# Allegro board QUADCOPTER1mthrbrd1_1.brd
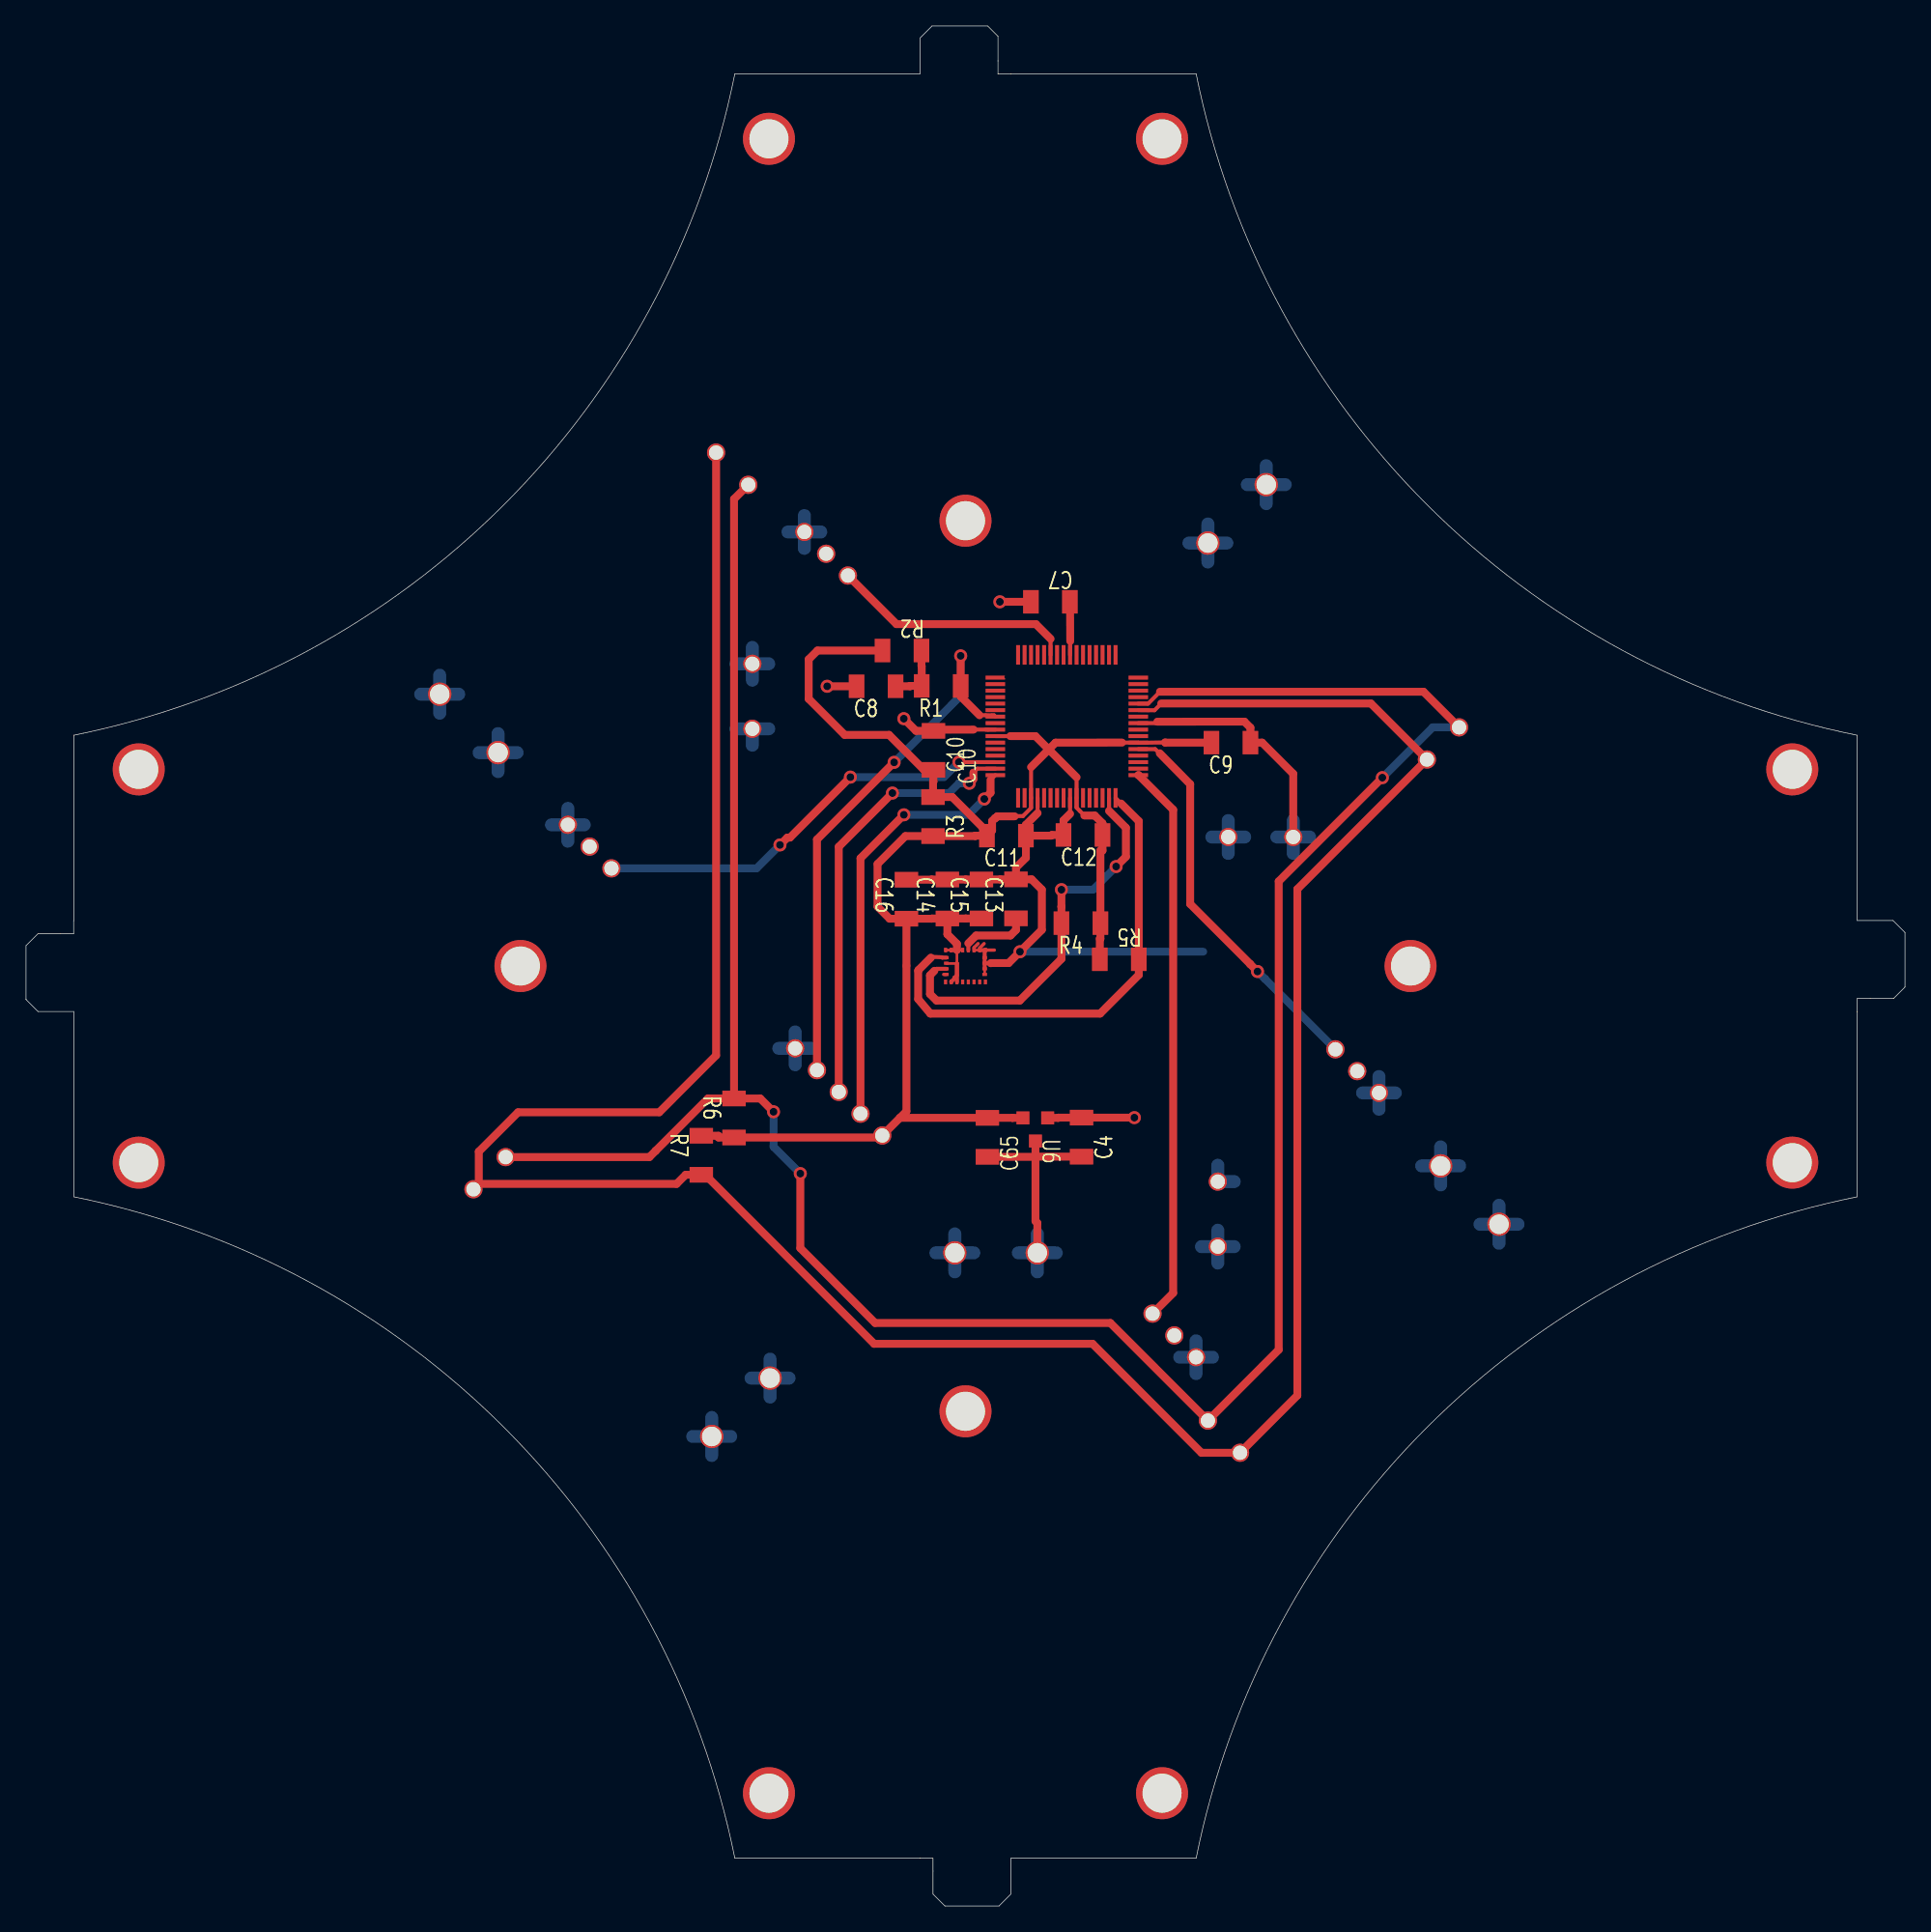
[diagram p0: board, top side]
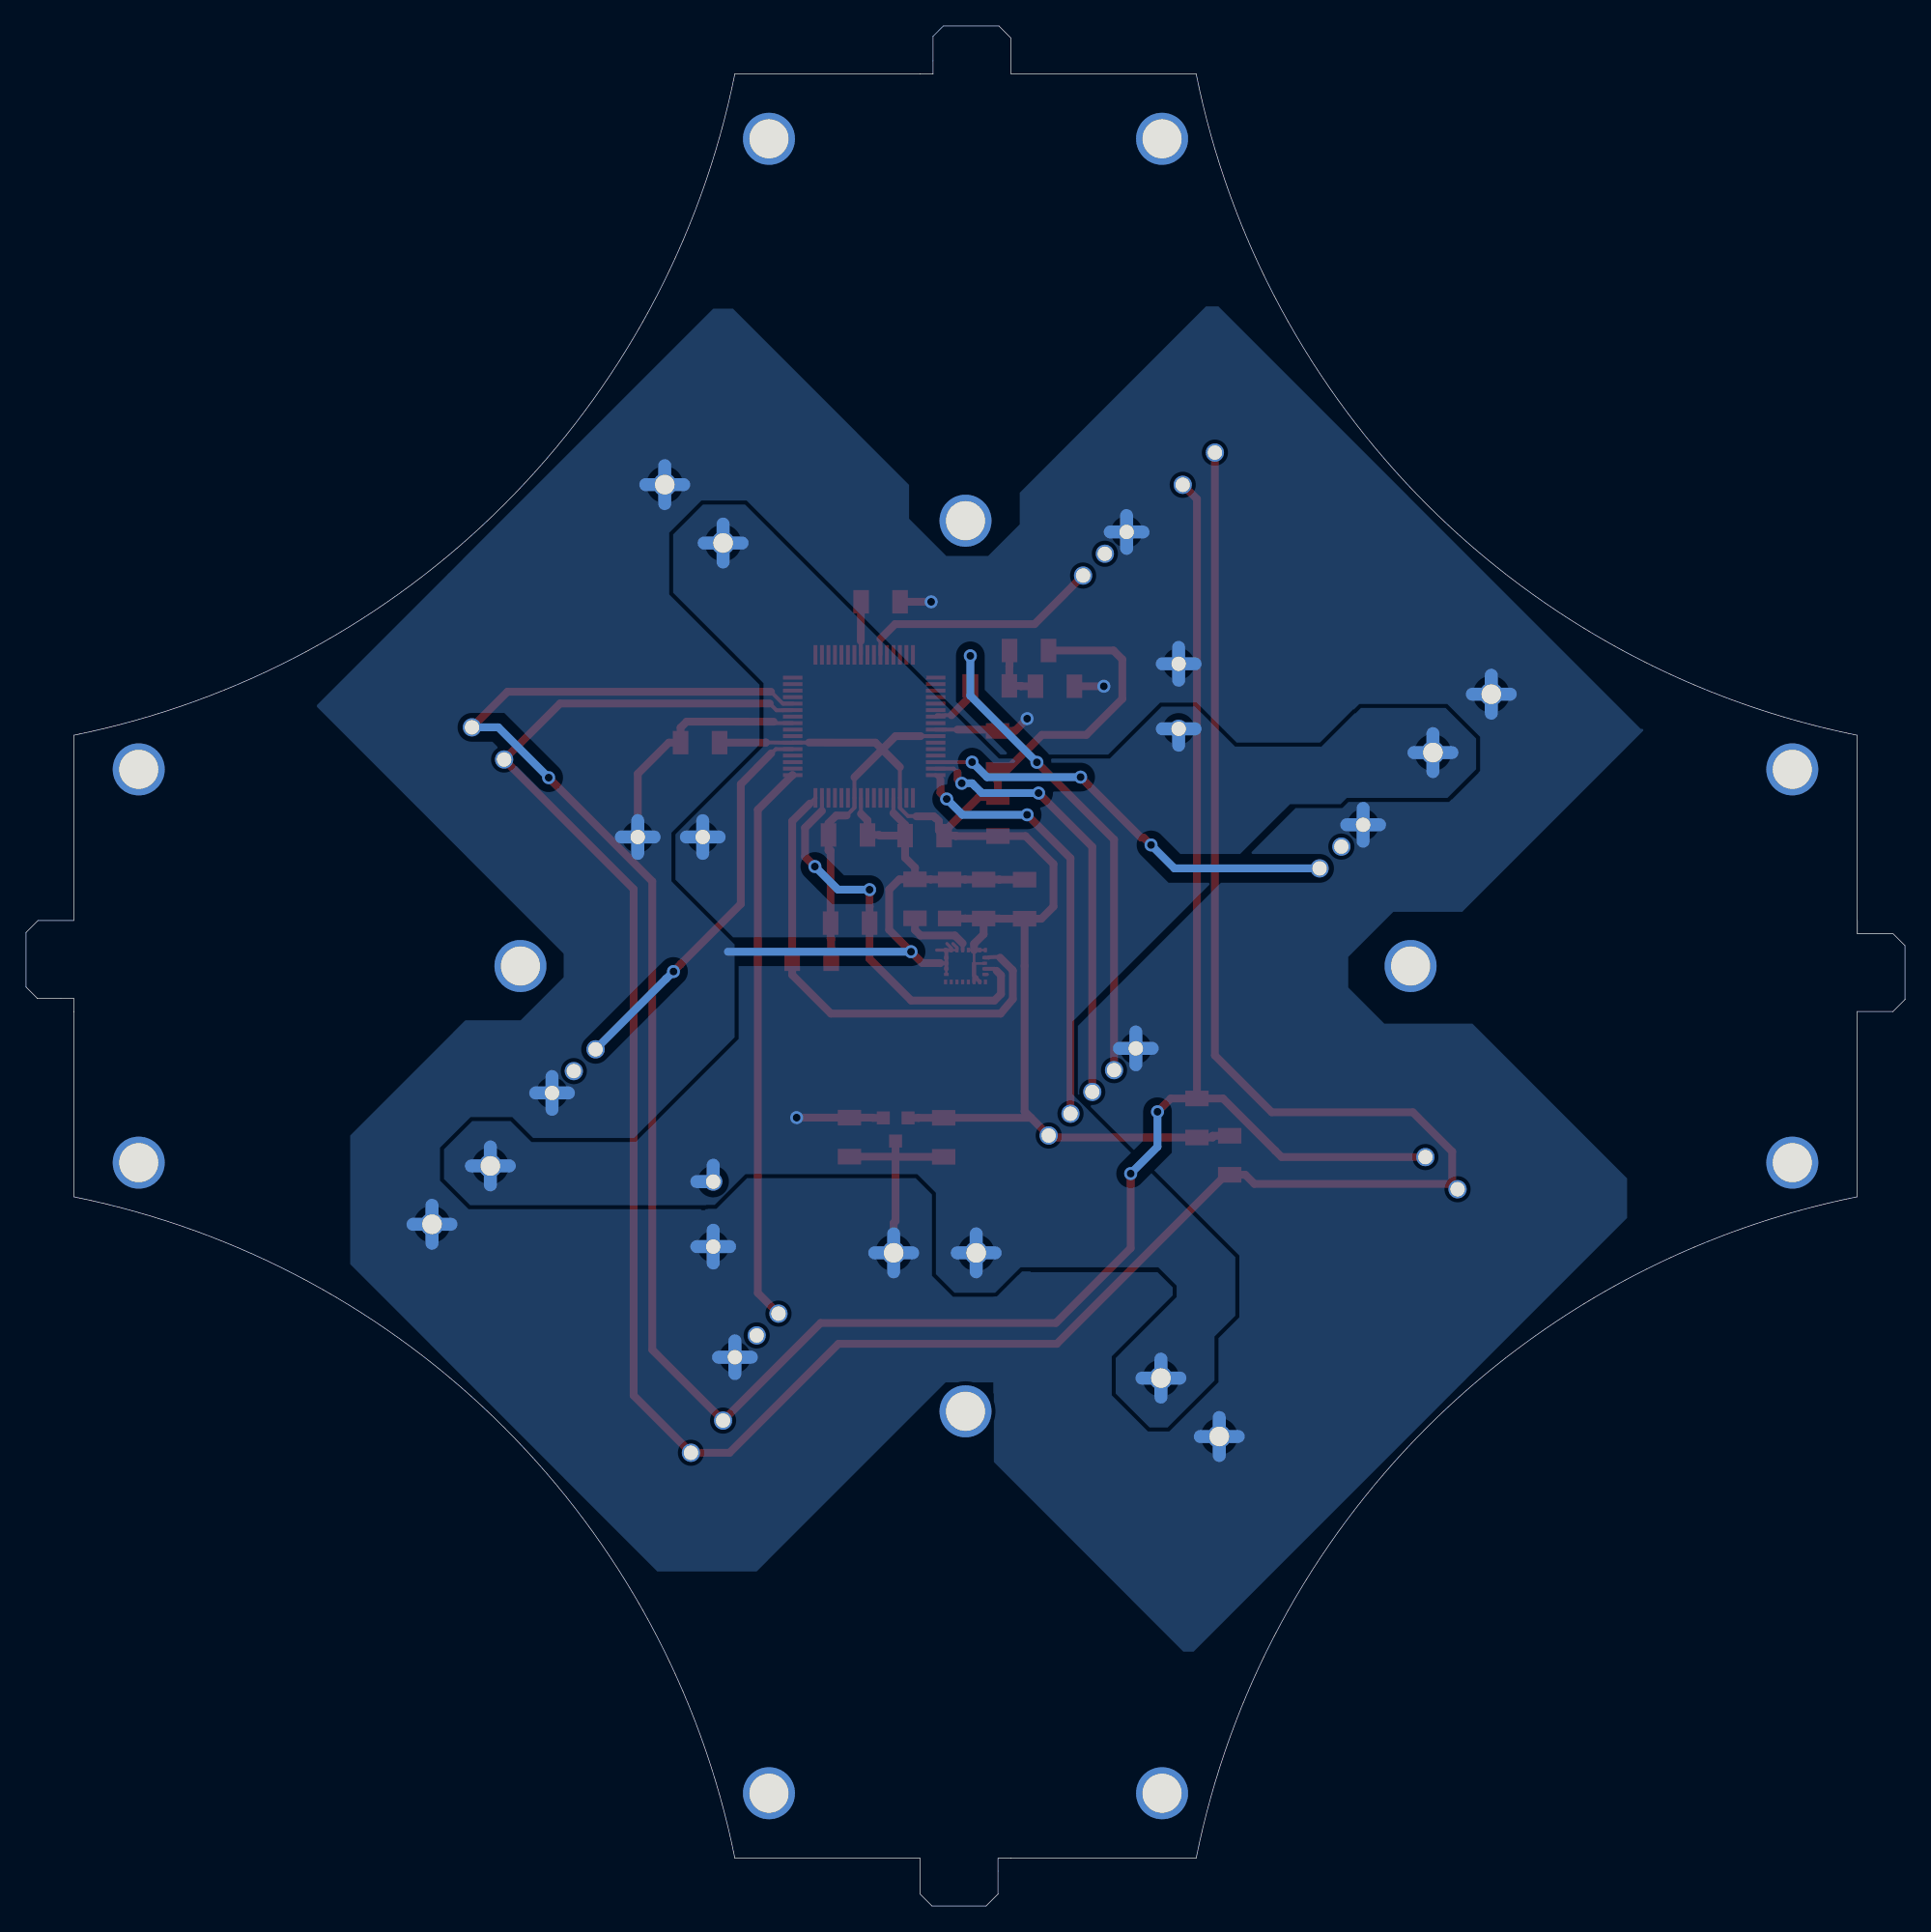
[diagram p1: board, bottom side, seen from below]

Outline 144.6 x 144.6 mm; copper layers: TOP, BOTTOM. Coordinates in mm from the lower left corner of the outline.
Outline path: 0,69.72 0.92,68.8 3.67,68.8 3.67,54.55 arc(36.8,36.8) 54.55,3.67 68.8,3.67 68.8,3.67 69.78,3.67 69.8,3.66 69.8,0.91 70.71,0 74.87,0 75.8,0.92 75.8,3.67 90.05,3.67 arc(107.8,36.8) 140.92,54.55 140.92,68.8 140.93,68.8 140.93,68.8 140.93,69.8 141.92,69.8 141.92,69.8 143.73,69.8 143.73,69.82 144.6,70.69 144.6,74.87 143.67,75.8 140.92,75.8 140.92,90.05 arc(107.8,107.8) 90.05,140.92 75.8,140.92 75.8,140.92 74.8,140.92 74.8,141.92 74.8,143.81 74,144.6 69.73,144.6 68.8,143.67 68.8,140.92 54.55,140.92 arc(36.8,107.8) 3.67,90.05 3.67,75.8 3.67,75.79 3.67,74.81 3.66,74.8 0.93,74.8 0,73.87 0,69.73 0,69.72

## Placement (name value [footprint] x y rotation side)
C1  100uF  [CAP250]  88.72 58.72 270 top
C2  100uF  [CAP250]  58.9 87.54 90 top
C3  100uF  [CAP250]  89.52 79.22 0 top
C4  10uF  [SMD_CAP_1206]  81.23 59.14 90 top
C5  10uF  [SMD_CAP_1206]  73.98 59.12 90 top
C7  10uF  [SMD_CAP_1206]  78.83 100.31 180 top
C8  10uF  [SMD_CAP_1206]  65.42 93.82 0 top
C9  .1uF  [SMD_CAP_1206]  92.73 89.48 0 top
C10  .1uF  [SMD_CAP_1206]  69.83 88.89 90 top
C11  .1uF  [SMD_CAP_1206]  75.45 82.33 0 top
C12  .1uF  [SMD_CAP_1206]  81.34 82.38 0 top
C13  10uF  [SMD_CAP_1206]  76.19 77.47 270 top
C14  100nF  [SMD_CAP_1206]  70.91 77.45 270 top
C15  10uF  [SMD_CAP_1206]  73.53 77.46 270 top
C16  100nF  [SMD_CAP_1206]  67.75 77.44 270 top
J1  CON2  [KDCONN2]  71.48 50.24 0 top
J2  CON2  [KDCONN2]  108.86 56.93 315 top
J3  CON2  [KDCONN2]  57.26 40.6 225 top
J4  CON2  [KDCONN2]  36.33 88.72 135 top
J5  CON2  [KDCONN2]  90.95 104.83 45 top
J6  CON2  [KDCONN2_2]  36.91 57.6 225 top
J7  CON2  [KDCONN2_2]  90.95 37.34 315 top
J8  CON2  [KDCONN2_2]  110.28 90.66 225 top
J9  CON2  [KDCONN2_2]  55.58 109.31 135 top
J10  CONN SOCKET 3  [CONN3FOOTPRINT]  43.38 81.49 315 top
J11  CONN SOCKET 3  [CONN3FOOTPRINT]  61.58 104.01 315 top
J12  CONN SOCKET 3  [CONN3FOOTPRINT]  102.44 64.22 135 top
J13  CONN SOCKET 3  [CONN3FOOTPRINT]  88.37 43.89 135 top
J16  CONN SOCKET 5  [CONN5FOOTPRINT]  59.19 65.97 315 top
NOREF  -  [unnamed]  135.92 57.17 0 top
NOREF#2  -  [unnamed]  57.17 135.92 0 top
NOREF#3  -  [unnamed]  72.3 106.55 0 top
NOREF#4  -  [unnamed]  87.42 8.67 0 top
NOREF#5  -  [unnamed]  87.42 135.92 0 top
NOREF#6  -  [unnamed]  8.67 87.42 0 top
NOREF#7  -  [unnamed]  72.3 38.05 0 top
NOREF#8  -  [unnamed]  38.05 72.3 0 top
NOREF#9  -  [unnamed]  106.55 72.3 0 top
NOREF#10  -  [unnamed]  135.92 87.42 0 top
NOREF#11  -  [unnamed]  57.17 8.67 0 top
NOREF#12  -  [unnamed]  8.67 57.17 0 top
R1  470  [SMD_CAP_1206]  70.43 93.84 0 top
R2  10k  [SMD_CAP_1206]  67.41 96.57 180 top
R3  10  [SMD_CAP_1206]  69.8 83.79 90 top
R4  10k  [SMD_CAP_1206]  81.18 75.6 0 top
R5  10k  [SMD_CAP_1206]  84.14 72.82 180 top
R6  10k  [SMD_CAP_1206]  54.49 60.61 270 top
R7  10k  [SMD_CAP_1206]  51.97 57.74 270 top
U1  PIC32MX440F256H  [PIC32MX440]  80.1 90.73 0 top
U5  LSM330_SENSOR  [SENSOR]  72.3 72.3 0 top
U6  LP38690-TO252  [SOT23]  77.68 59.73 270 top

## Library data of the parts
C1-C3 = CAP
C4 C5 C7-C16 = C
J1-J9 = CON2
J10-J13 = CONN SOCKET 3
J16 = CONN SOCKET 5
R1-R7 = R
U1 = PIC32MX440F256H_10
U5 = LSM330_SENSOR_0
U6 = LP38690-TO252

## Footprints (pads in the part's own frame, mm; a bottom-side part is the same pattern mirrored in y, then rotated)
CAP250
  round 1.4 hole 1.1: 1(3,3) 2(8,3)
CONN3FOOTPRINT
  round 1.4 hole 1.1: 1(0,0) 2(2.37,0) 3(-2.37,0)
CONN5FOOTPRINT
  round 1.4 hole 1.1: 1(0,0) 2(2.37,0) 3(4.74,0) 4(7.11,0) 5(9.48,0)
KDCONN2
  round 1.8 hole 1.5: 1(0,0) 2(6.35,0)
KDCONN2_2
  round 1.4 hole 1.1: 1(0,0) 2(3.5,0)
PIC32MX440
  custom 1.5x0.3 smd: 1(-5.5,3.75)
  rect 1.5x0.3 smd: 2(-5.5,3.25) 3(-5.5,2.75) 4(-5.5,2.25) 5(-5.5,1.75) 6(-5.5,1.25) 7(-5.5,0.75) 8(-5.5,0.25) 9(-5.5,-0.25) 10(-5.5,-0.75) 11(-5.5,-1.25) 12(-5.5,-1.75) 13(-5.5,-2.25) 14(-5.5,-2.75) 15(-5.5,-3.25) 16(-5.5,-3.75) 33(5.5,-3.75) 34(5.5,-3.25) 35(5.5,-2.75) 36(5.5,-2.25) 37(5.5,-1.75) 38(5.5,-1.25) 39(5.5,-0.75) 40(5.5,-0.25) 41(5.5,0.25) 42(5.5,0.75) 43(5.5,1.25) 44(5.5,1.75) 45(5.5,2.25) 46(5.5,2.75) 47(5.5,3.25) 48(5.5,3.75)
  rect 0.3x1.5 smd: 17(-3.75,-5.5) 18(-3.25,-5.5) 19(-2.75,-5.5) 20(-2.25,-5.5) 21(-1.75,-5.5) 22(-1.25,-5.5) 23(-0.75,-5.5) 24(-0.25,-5.5) 25(0.25,-5.5) 26(0.75,-5.5) 27(1.25,-5.5) 28(1.75,-5.5) 29(2.25,-5.5) 30(2.75,-5.5) 31(3.25,-5.5) 32(3.75,-5.5) 49(3.75,5.5) 50(3.25,5.5) 51(2.75,5.5) 52(2.25,5.5) 53(1.75,5.5) 54(1.25,5.5) 55(0.75,5.5) 56(0.25,5.5) 57(-0.25,5.5) 58(-0.75,5.5) 59(-1.25,5.5) 60(-1.75,5.5) 61(-2.25,5.5) 62(-2.75,5.5) 63(-3.25,5.5) 64(-3.75,5.5)
SENSOR
  custom 0.24x0.36 smd: 1(-1.535,1.225)
  rect 0.36x0.24 smd: 2(-1.475,0.645) 3(-1.475,0.215) 4(-1.475,-0.215) 5(-1.475,-0.645) 14(1.475,-0.645) 15(1.475,-0.215) 16(1.475,0.215) 17(1.475,0.645)
  rect 0.24x0.36 smd: 6(-1.535,-1.225) 7(-1.097,-1.225) 8(-0.658,-1.225) 9(-0.219,-1.225) 10(0.22,-1.225) 11(0.658,-1.225) 12(1.097,-1.225) 13(1.535,-1.225) 18(1.535,1.225) 19(1.097,1.225) 20(0.658,1.225) 21(0.219,1.225) 22(-0.22,1.225) 23(-0.658,1.225) 24(-1.097,1.225)
SMD_CAP_1206
  rect 1.2x1.8 smd: 1(-1.5,0) 2(1.5,0)
SOT23
  rect 1x1 smd: 1(-0.889,0.94) 2(-0.889,-0.965) 3(0.889,0)
unnamed
  round 4 hole 3 unplated: (0,0)

## Nets
3.3V: C5.2 C9.1 C10.1 C11.1 C12.2 C14.2 C15.2 C16.2 J16.5 R2.2 R3.1 R3.2 R4.2 R5.2 R6.2 R7.1 U1.10(VDD#10) U1.19(AVDD) U1.26(VDD#26) U1.38(VDD#38) U5.1(VDD_IO#1) U5.3(VDD_IO#3) U5.7(CS_G) U5.8(CS_A) U5.22(VDD#22) U5.23(VDD#23) U5.24(VDD#24) U6.2(VOUT)
12V: C1.1 C2.1 C3.1 C4.2 J1.1 J2.1 J3.1 J4.1 J5.1 U6.1(VIN)
GND: C1.2 C2.2 C3.2 C4.1 C5.1 C7.2 C8.1 C9.2 C10.2 C11.2 C12.1 C13.1 C14.1 C15.1 C16.1 J1.2 J2.2 J3.2 J4.2 J5.2 J10.3 J11.3 J12.3 J13.3 J16.1 U1.9(VSS#9) U1.20(AVSS) U1.25(VSS#25) U1.41(VSS#41) U5.14(RES3) U5.15(RES2) U5.16(RES1) U5.17(RES0) U5.18(RES) U5.19(GND#19) U5.20(GND#20) U6.3(GND)
ICSPCLOCK: J16.3 U1.15(RB1)
ICSPDATA: J16.4 U1.16(RB0)
NMCLR: J16.2 R1.2 U1.7($0)
PWM1: J10.2 U1.14(RB2)
PWM2: J11.2 U1.59(RF1)
PWM3: J12.2 U1.37(RG2)
PWM4: J13.2 U1.33(RF3)
SCL1: J6.1 J7.1 J8.1 J9.1 R6.1 U1.44(SCL1)
SCL2: R5.1 U1.32(SCL2) U5.2(SCL_A/G)
SDA1: J6.2 J7.2 J8.2 J9.2 R7.2 U1.43(SDA1)
SDA2: R4.1 U1.31(SDA2) U5.4(SDA/SDL_A/G)
N01207: C8.2 R1.1 R2.1
N168078: C13.2 U5.21(CAP)
N193232: C7.1 U1.56(VCAP)

Pads without a net: J10 1; J11 1; J12 1; J13 1; U1 1 2 3 4 5 6 8 11 12 13 17 18 21 22 23 24 27 28 29 30 34 35 36 39 40 42 45 46 47 48 49 50 51 52 53 54 55 57 58 60 61 62 63 64; U5 5 6 9 10 11 12 13

## Via types
v1: diameter 1, hole 0.6, TOP to BOTTOM, 20 vias

## Routing (per net, layer and track width the routed paths; a pad name or vN(x,y) marks a point on that pad's centre or on a via; arc(x,y) is an arc through that point)
3.3V: length 145.2
  TOP w0.2: U5.3 70.84,72.5 71.64,72.5 U5.23 U5.22 ; U5.1 U5.24
  TOP w0.3: 76.08,83.81 76.1,83.83 76.72,83.83 77.35,84.46 U1.19 77.35,87.6 ; U5.7 71.2,71.09 71.46,71.35 71.46,71.4 71.51,71.4 71.51,71.44 71.64,71.58 71.64,72.5 U5.8 ; 81.45,83.88 81.09,84.23 80.85,84.48 U1.26 80.85,86.82 ; U5.24 U5.23 ; 87.66,89.5 85.61,89.46 U1.38 84.34,89.49 ; 75.75,89.98 U1.10
  TOP w0.6: R5.2 82.64,74.4 82.68,74.4 R4.2 82.68,81.18 82.84,81.18 C12.2 82.84,83.28 82.24,83.88 81.45,83.88 ; C11.1 73.05,82.33 73.05,82.29 R3.1 67.68,82.29 65.53,80.15 65.53,76.87 66.46,75.94 C16.2 ; C11.1 73.95,82.63 71.28,85.29 R3.2 69.8,86.49 69.83,86.49 C10.1 69.11,87.39 66.42,90.08 63,90.08 60.23,92.85 60.23,95.89 60.91,96.57 R2.2 ; C11.1 74.35,82.73 74.35,83.45 74.57,83.67 74.6,83.67 74.74,83.81 76.08,83.81 ; U6.2 75.92,60.62 75.92,60.62 C5.2 67.26,60.62 ; 67.26,60.62 J16.5 65.9,59.11 R6.2 53.29,59.11 53.29,59.24 R7.1 ; 67.26,60.62 67.75,61.12 67.75,72.31 C16.2 ; C14.2 72.33,75.95 72.33,75.96 C15.2 ; C14.2 70.91,74.74 71.64,74 U5.23 ; C14.2 69.71,75.95 69.71,75.94 C16.2 ; 78.71,88.96 77.68,89.98 75.75,89.98 ; 78.71,88.96 80.85,86.82 ; 78.71,88.96 79.23,89.48 84.34,89.49 ; 78.71,88.96 77.35,87.6 ; 87.66,89.5 87.68,89.48 C9.1
12V: length 47.2
  TOP w0.6: U6.1 79.42,60.62 79.44,60.64 C4.2 v1(85.3,60.64)
  BOTTOM w1: 107.41,56.93 J2.1 ; J2.1 108.86,58.38 ; J2.1 108.86,55.47 ; J2.1 110.32,56.93 ; J1.1 71.48,51.7 ; J1.1 71.48,48.78 ; J1.1 70.02,50.24 ; J1.1 72.94,50.24 ; 55.9,89.29 C2.1 ; C2.1 57.16,90.54 ; C2.1 54.64,90.54 ; J3.1 58.72,40.6 ; J3.1 57.26,39.15 ; J3.1 55.8,40.6 ; J3.1 57.26,42.06 ; 89.5,104.83 J5.1 ; J5.1 90.95,106.29 ; J5.1 90.95,103.38 ; J5.1 92.41,104.83 ; C3.1 92.52,83.48 ; C3.1 92.52,80.97 ; C3.1 93.78,82.22 ; C3.1 91.26,82.22 ; 36.33,87.26 J4.1 ; J4.1 34.87,88.72 ; J4.1 37.79,88.72 ; J4.1 36.33,90.17 ; 92.97,55.72 C1.1 91.72,56.98
GND: length 167.7
  TOP w0.2: U5.14 U5.15 ; U5.20 U5.19
  TOP w0.25: U5.18 74.52,73.52 ; U5.19 73.4,73.69 73.73,74.02 ; U5.20 72.96,73.71 73.27,74.02
  TOP w0.3: U5.16 74.25,72.51 ; U5.16 U5.17 73.77,73.46 U5.18 U5.19 ; U5.16 U5.15 ; U1.41 86.96,90.98 87.07,91.09 ; U1.25 80.35,84.01 ; 72.92,90.48 73.84,90.48 74.04,90.48 U1.9 ; U1.20 77.85,84.06
  TOP w0.6: C13.1 77.39,78.97 78.18,78.18 78.18,75.08 v1(76.49,73.4) 75.62,72.52 74.26,72.52 74.25,72.51 ; C13.1 76.19,79.87 76.95,80.63 C11.2 ; C13.1 74.99,78.97 74.98,78.96 C15.1 72.33,78.96 72.32,78.95 C14.1 69.71,78.95 69.69,78.94 67.75,78.94 ; C11.2 78.89,82.33 78.94,82.38 C12.1 79.84,83.5 80.35,84.01 ; C11.2 76.95,83.16 77.85,84.06 ; C5.1 77.67,57.62 77.68,57.64 ; 77.68,57.64 77.69,57.64 C4.1 ; 77.68,57.64 77.68,52.68 77.83,52.54 J1.2 ; 77.68,57.64 U6.3 ; C7.2 v1(74.94,100.31) ; C8.1 v1(61.65,93.82) ; 72.92,90.48 69.92,90.48 C10.2 68.49,90.39 v1(67.55,91.32) ; 87.07,91.09 93.76,91.1 94.23,90.63 94.23,89.48 C9.2 95.13,89.48 97.52,87.09 C3.2
  BOTTOM w0.6: 90.59,73.4 v1(76.49,73.4)
  BOTTOM w1: 30.38,93.21 J4.2 ; J4.2 31.84,94.66 ; J4.2 33.3,93.21 ; J4.2 31.84,91.75 ; J16.1 59.19,67.23 ; J16.1 60.45,65.97 ; J16.1 59.19,64.71 ; J16.1 57.93,65.97 ; 58.64,105.69 J11.3 ; J11.3 59.9,106.94 ; J11.3 61.16,105.69 ; J11.3 59.9,104.43 ; J1.2 77.83,51.7 ; J1.2 76.37,50.24 ; J1.2 79.29,50.24 ; J1.2 77.83,48.78 ; C1.2 92.97,50.72 ; C1.2 90.46,50.72 ; C1.2 91.72,49.46 ; C1.2 91.72,51.98 ; 102.86,62.54 J12.3 ; J12.3 104.12,63.8 ; J12.3 104.12,61.28 ; J12.3 105.38,62.54 ; J2.2 113.35,53.89 ; J2.2 114.81,52.44 ; J2.2 113.35,50.98 ; J2.2 111.9,52.44 ; J3.2 54.23,36.11 ; J3.2 51.31,36.11 ; J3.2 52.77,34.66 ; J3.2 52.77,37.57 ; J5.2 95.44,110.78 ; J5.2 96.9,109.32 ; J5.2 93.99,109.32 ; J5.2 95.44,107.87 ; C3.2 98.78,82.22 ; C3.2 97.52,80.97 ; C3.2 96.26,82.22 ; C3.2 97.52,83.48 ; J13.3 91.3,42.21 ; J13.3 88.79,42.21 ; J13.3 90.04,43.47 ; J13.3 90.04,40.95 ; 40.44,83.16 J10.3 ; J10.3 41.7,84.42 ; J10.3 42.96,83.16 ; J10.3 41.7,81.9 ; 55.9,94.29 C2.2 ; C2.2 55.9,96.8 ; C2.2 57.16,95.54 ; C2.2 54.64,95.54
ICSPCLOCK: length 33.7
  TOP w0.3: U1.15 73.21,87.48 72.91,87.18
  TOP w0.6: v1(66.68,85.6) 62.54,81.47 J16.3 ; 72.91,87.18 72.91,86.67 v1(72.59,86.35)
  BOTTOM w0.6: v1(72.59,86.35) 71.79,86.35 71.04,85.6 v1(66.68,85.6)
ICSPDATA: length 33.3
  TOP w0.3: 74.23,86.61 U1.16
  TOP w0.6: J16.4 64.22,80.59 v1(67.56,83.93) ; v1(73.75,85.15) 74.23,85.63 74.23,86.61
  BOTTOM w0.6: v1(73.75,85.15) 72.53,83.93 v1(67.56,83.93)
Net_28: length 0.2
  TOP w0.25: 70.82,71.65 70.62,71.65
NMCLR: length 42.9
  TOP w0.3: U1.7 74.5,91.58 74.33,91.58 73.85,91.59 73.38,91.59
  TOP w0.6: J16.2 60.87,82.03 v1(66.81,87.96) ; v1(71.93,96.16) R1.2 71.93,93.04 73.38,91.59
  BOTTOM w0.6: v1(66.81,87.96) 71.93,93.09 v1(71.93,96.16)
PWM1: length 32.9
  TOP w0.3: U1.14 v1(71.79,87.98)
  TOP w0.6: v1(58.02,81.61) 58.59,82.18 58.79,82.18 v1(63.44,86.83)
  BOTTOM w0.6: J10.2 56.22,79.81 v1(58.02,81.61) ; v1(71.79,87.98) 70.64,86.83 v1(63.44,86.83)
PWM2: length 18.8
  TOP w0.3: U1.59 78.85,97.46
  TOP w0.6: 78.85,97.46 77.71,98.6 66.99,98.6 J11.2
PWM3: length 30.1
  TOP w0.3: U1.37 86.89,88.98 87.25,88.66
  TOP w0.6: 87.25,88.66 89.59,86.28 89.59,77.07 94.21,72.45 94.21,72.44 v1(94.77,71.88)
  BOTTOM w0.6: J12.2 95.35,71.31 95.34,71.31 v1(94.77,71.88)
PWM4: length 43.2
  TOP w0.6: U1.33 85.62,86.98 88.28,84.32 88.28,47.15 J13.2
SCL1: length 207.5
  TOP w0.3: 87.27,93.4 86.35,92.48 U1.44
  TOP w0.6: J9.1 54.49,108.22 R6.1 ; J8.1 107.54,93.4 87.27,93.4 ; J6.1 47.97,57.6 48.46,58.09 52.48,62.11 R6.1 ; R6.1 56.5,62.11 v1(57.53,61.09) ; v1(104.38,86.79) 96.4,78.81 96.4,42.79 J7.1 83.45,44.84 65.35,44.84 59.59,50.6 v1(59.59,56.33)
  BOTTOM w0.6: v1(59.59,56.33) 57.53,58.4 v1(57.53,61.09) ; v1(104.38,86.79) 108.25,90.66 J8.1
SCL2: length 37.9
  TOP w0.3: 69.64,72.94 69.67,72.94 69.73,73 70.48,72.97 70.51,72.94 U5.2 ; U1.32 84.28,84.8
  TOP w0.6: 69.64,72.94 68.68,71.99 68.66,71.92 68.66,69.76 69.59,68.64 82.66,68.64 85.64,71.62 R5.1 85.64,83.44 84.28,84.8
SDA1: length 222
  TOP w0.3: U1.43 86.39,91.97 86.85,91.97 87.37,92.49
  TOP w0.6: 34.84,55.54 50.06,55.54 50.77,56.24 R7.2 52.27,56.24 65.27,43.24 82.08,43.24 90.46,34.86 J7.2 97.84,39.27 97.84,78.21 J8.2 103.5,92.49 87.37,92.49 ; 34.84,55.54 J6.2 ; 34.84,55.54 34.84,58.02 37.87,61.05 48.73,61.05 53.11,65.42 J9.2
SDA2: length 31
  TOP w0.3: 69.91,71.93 70.07,72.08 U5.4 ; 83.35,84.23 U1.31
  TOP w0.6: v1(79.68,78.17) 79.68,76.87 R4.1 79.68,72.85 76.48,69.64 70.07,69.64 69.57,70.15 69.57,71.58 69.91,71.93 ; v1(83.89,79.95) 84.65,80.71 84.65,82.93 83.35,84.23
  BOTTOM w0.6: v1(83.89,79.95) 82.11,78.17 v1(79.68,78.17)
N01207: length 4.8
  TOP w0.6: C8.2 68.03,93.82 68.03,93.84 R1.1 68.93,95.37 68.91,95.37 R2.1
N168078: length 5.5
  TOP w0.3: U5.21 72.52,74.05
  TOP w0.6: 72.52,74.05 73.12,74.65 75.76,74.65 76.19,75.07 C13.2
N193232: length 4.1
  TOP w0.3: U1.56 80.36,97.3
  TOP w0.6: 80.36,97.3 80.35,100.3 C7.1

## Copper pours and planes (outline as drawn; the poured copper is in the pictures)
12V on BOTTOM: 56.75,36.81 53.14,40.41 53.14,43.8 51.53,45.41 51.53,49.9 64.1,62.47 64.1,67.98 47.86,84.22 47.84,84.22 47.31,84.75 43.43,84.75 42.95,85.23 35.21,85.23 33.01,87.43 33.01,89.8 34.14,90.93 35.35,92.15 41.87,92.15 42.28,91.74 42.34,91.74 44.94,89.14 44.97,89.18 51.56,89.18 54.63,92.25 57.2,92.25 61.19,88.26 69.73,88.26 89.27,107.8 92.5,107.8 94.8,105.5 94.8,101.01 87.85,94.06 87.85,89.2 94.62,82.43 94.62,78.94 89.76,74.08 89.76,66.69 97.69,58.77 105.7,58.77 107.31,60.37 110.26,60.37 112.43,58.2 112.43,55.92 110.41,53.9 92.61,53.9 92.27,53.9 92.24,53.93 91.59,53.93 89.23,56.29 76.01,56.29 74.58,54.86 74.58,48.6 73.14,47.17 70.01,47.17 68.06,49.12 57.46,49.12 56.05,47.71 56.05,46.84 60.74,42.15 60.74,39.41 58.13,36.81
GND on BOTTOM: 67.29,48.81 68.14,48.81 70.16,46.79 70.16,39.43 68.68,39.43 67.29,40.82
GND on BOTTOM: 54.75,19.56 21.39,52.92 21.39,55.96 33.29,67.87 40.07,67.87 42.85,70.65 42.85,72.99 39.37,76.47 34.07,76.47 20,90.54 20.34,90.54 52.84,123.04 53.79,123.04 68.13,108.7 68.13,106.27 70.56,103.84 73.78,103.84 76.64,106.7 76.64,109.31 90.2,122.86 91.72,122.86 122.21,92.37 122.21,92.24 103.23,73.25 103.23,71.43 106.53,68.13 110.79,68.13 119.65,59.27 119.65,49.36 96.02,25.73 88.37,25.73 73.83,40.27 68.35,40.27 68.08,40.53 68.08,48.94 68.1,48.95 70.01,47.04 73.18,47.04 74.7,48.56 74.7,54.84 75.87,56.01 90.44,56.01 90.44,55.97 92.66,53.75 110.38,53.75 112.53,55.9 112.53,58.22 110.28,60.48 107.17,60.48 105.68,59 97.61,59 89.98,66.63 89.98,73.89 94.76,78.67 94.76,81.56 88.07,88.25 88.07,94.05 94.94,100.92 94.94,105.54 92.55,107.93 89.2,107.93 69.62,88.34 61.02,88.34 57.34,92.02 55.26,92.02 50.98,87.74 42.39,87.74 42.39,91.78 41.95,92.23 35.27,92.23 32.81,89.77 32.81,87.15 34.86,85.11 42.9,85.11 43.42,84.59 46.75,84.59 63.65,67.69 63.65,62.35 51.37,50.07 51.37,45.33 53,43.7 53,40.34 56.67,36.67 58.21,36.67 60.88,39.34 60.88,42.15 56.2,46.84 56.19,46.85 56.19,47.67 57.26,48.75 67.9,48.75 67.9,40.45 68.29,40.06 69.85,40.06 70.12,39.8 70.12,34.15 55.53,19.56 ; 1 cut-out
